# Altium PCB PCB3.PcbDoc
Units mm, origin at the board's own origin, x right, y up, seen from the top; angles counter-clockwise.
Board outline 24.13 x 24.13 mm, 2 copper layers (Top Layer, Bottom Layer); 10 components, 10 nets, 30 pads, 2 vias.
Unrouted connection lines stored in the file: 1.
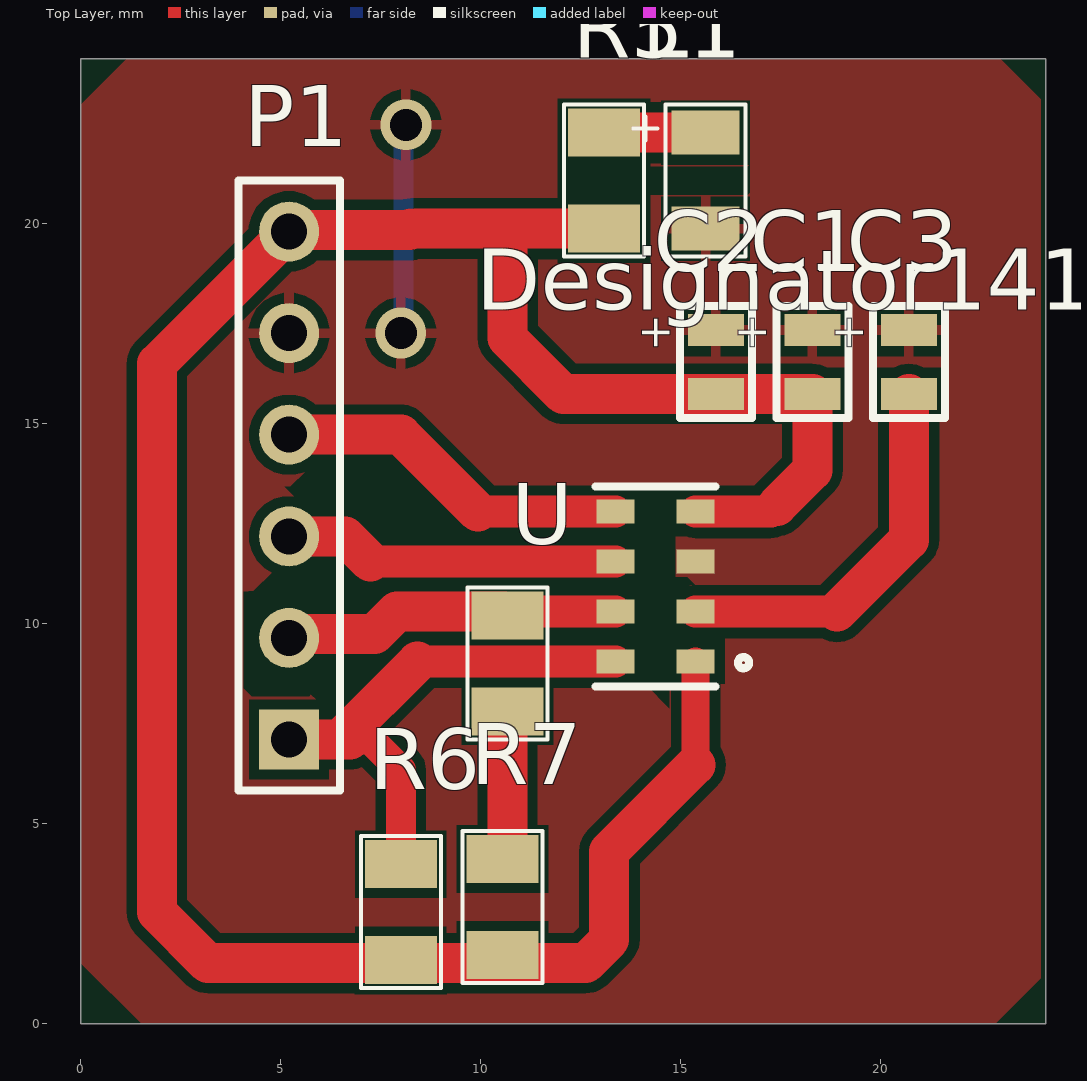
[diagram p0: Top Layer view]
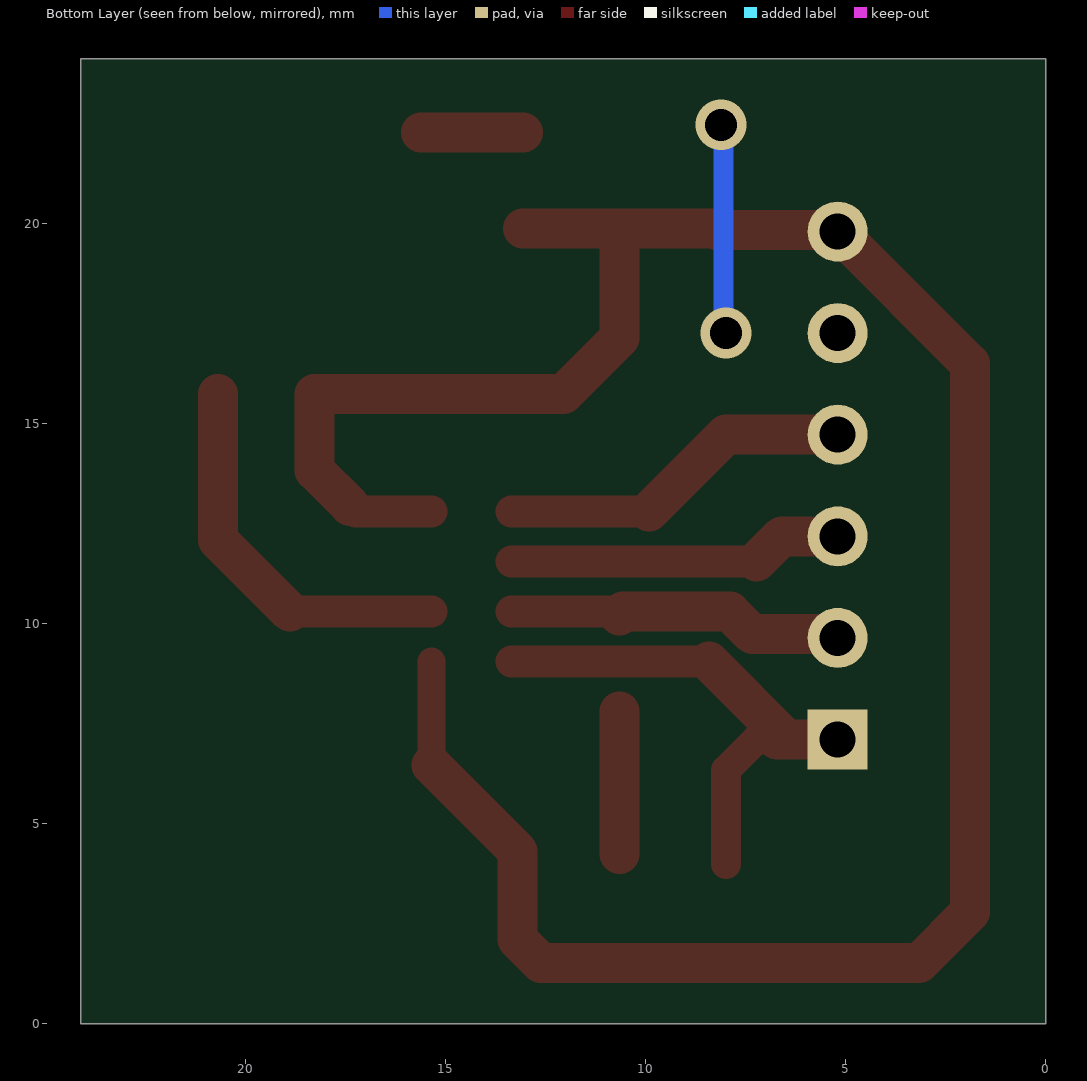
[diagram p1: Bottom Layer view, seen from below]
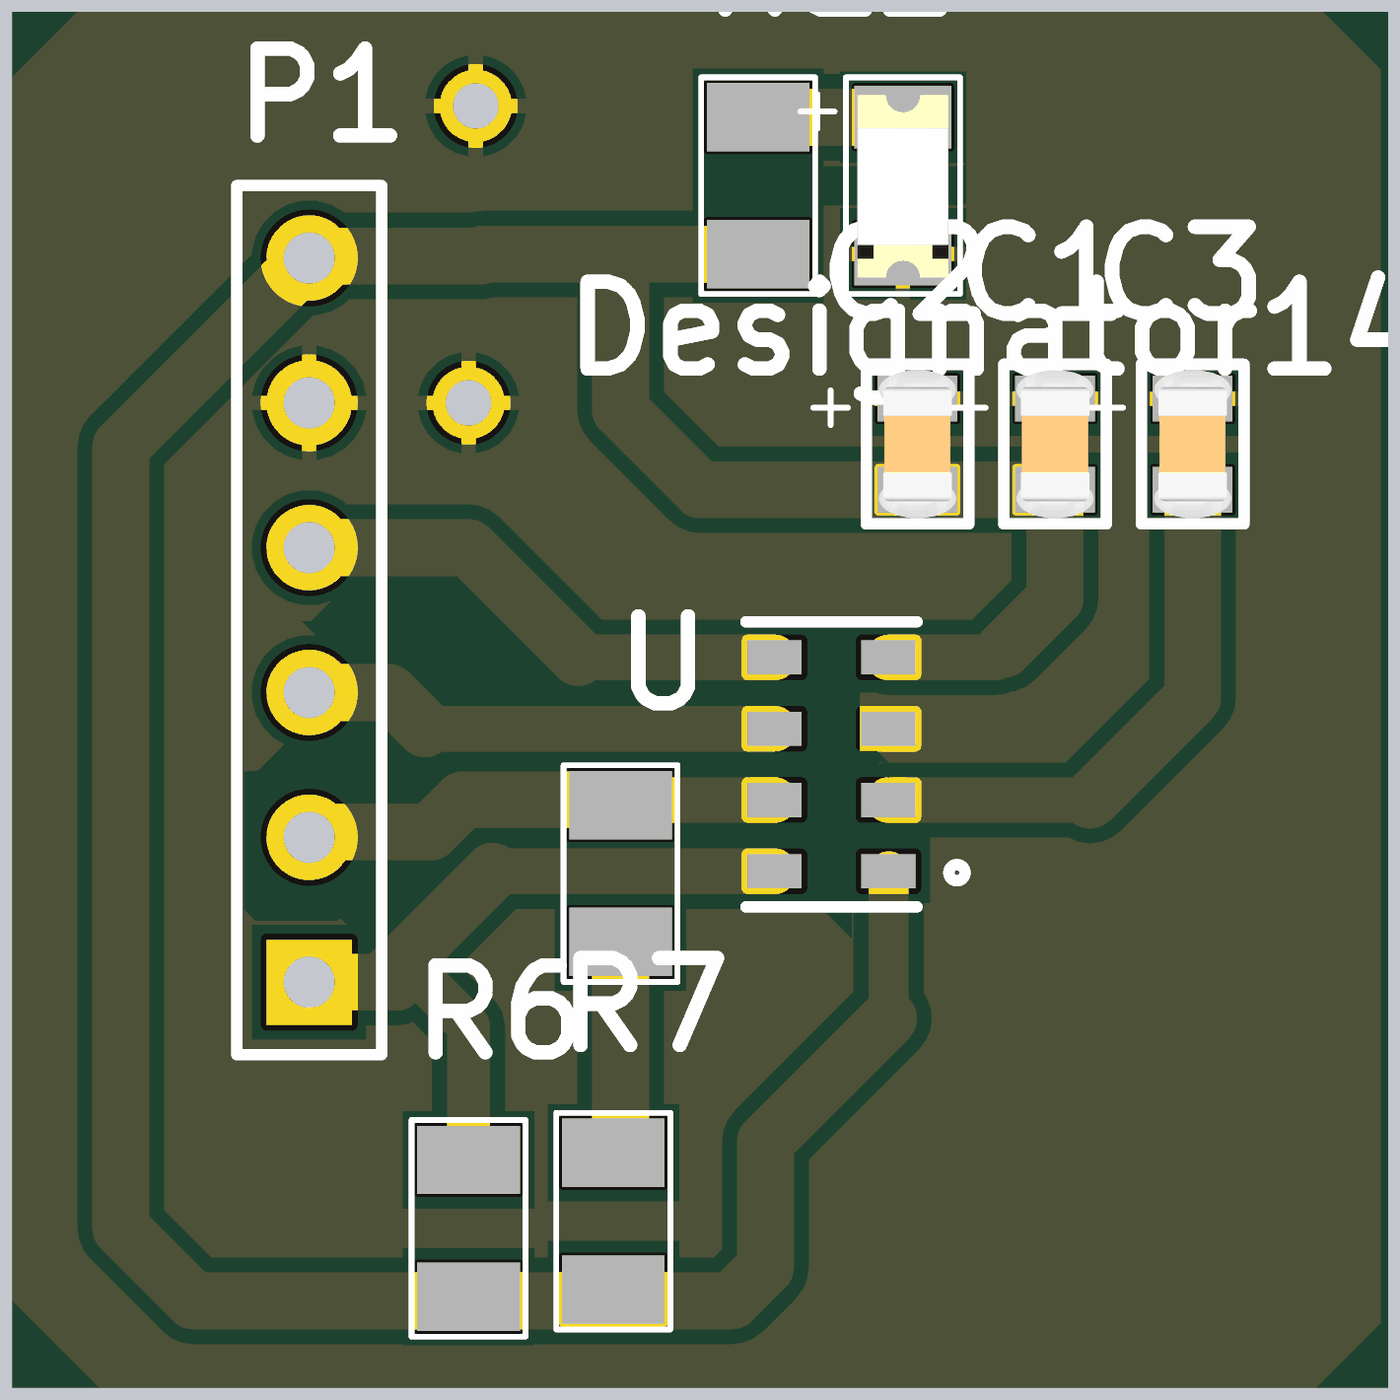
[diagram p2: 3D render of the assembled board from above, using the file's embedded part models]

## Layer stack, top to bottom
Top Solder: solder mask 0.0102, Solder Resist, Dk 3.5
Top Layer: signal copper 0.0356
Dielectric 1: dielectric 0.32, FR-4, Dk 4.8
Bottom Layer: signal copper 0.0356
Bottom Solder: solder mask 0.0102, Solder Resist, Dk 3.5

## Board outline
0,0 0,24.13 24.13,24.13 24.13,0

## Design rules (kind name [scope] priority, off if disabled: settings)
Clearance [All] p1: gap=0.254 ignorepadtopadclearanceinfootprint=FALSE except(0: Arc-Hole Track-Hole SMDPad-Hole THPad-Hole Via-Hole Fill-Hole Poly-Hole Region-Hole Text-Hole)
PolygonConnect [All] p1: connectstyle=Relief reliefconductorwidth=0.254 reliefentries=4 polygonreliefangle="90 Angle" airgapwidth=0.254
RoutingVias [All] p1: holewidth=0.711 width=1.27 viastyle="Through Hole" minholewidth=0.711 minwidth=1.27 maxholewidth=0.711 maxwidth=1.27
SolderMaskExpansion [All] p1: expansion=0.102 istentingtop=FALSE
Width [All] p1: maxlimit=1.5 minlimit=0.254 preferedwidth=0.254
30 further rules are at their usual default settings.

## Classes and differential pairs
component class Sheet3: C1 C2 C3 L1 P1 R5 U

## Components (designator, comment, footprint, x,y, rotation, side; value= is the part's Value field where it differs from the comment)
C1 "100nF" CAP_805 18.288,16.548 r270 top
C2 "10uF" CAP_805 15.875,16.548 r270 top
C3 "CAP 100nF 0805" CAP_805 20.701,16.548 r270 top
Designator141 "Comment" RES_1206 10.668,9.017 r90 top
L1 "Led Red" "Led 1206" 15.621,21.082 r270 top
P1 "Header 6" HDR1X6 5.207,7.112 r90 top
R5 "220R" RES_1206 13.081,21.082 r270 top
R6 "4.7K" RES_1206 8.001,2.794 r270 top
R7 "4.7K" RES_1206 10.541,2.921 r270 top
U "MPL3115A2" PSON125P300X500X120-8N 14.367,10.932 r180 top

## Footprints (in the part's own frame and the unit in brackets; to place one, negate y for a bottom-side part, rotate by r counter-clockwise, add the part's x,y. Pads: shape width x height; smd on the part's side, far side on the other; paste and mask are expansions set on the pad)
CAP_805 [mm]
  rect 0.8x1.4 smd mask+0.05: 1(-0.8,0) 2(0.8,0)
  silkscreen extent -1.4,-0.9 1.4,0.9, body extent -1.3,-0.68 1.3,0.68, height 0.9
HDR1X6 [mm] "Connector; Header; 6 Position"
  rect 1.5x1.5 hole 0.9: 1(0,0)
  round 1.5 hole 0.9: 2(2.54,0) 3(5.08,0) 4(7.62,0) 5(10.16,0) 6(12.7,0)
  silkscreen extent -1.27,-1.27 13.97,1.27
"Led 1206" [mm]
  rect 1.1x1.7 smd mask+0.05: 1(-1.2,0) 2(1.2,0)
  silkscreen extent -1.9,-1.8 1.9,1, body extent -1.59,-0.8 1.61,0.8, height 1.1
PSON125P300X500X120-8N [mm]
  rect 0.95x0.6 smd: 1(-1,1.875) 2(-1,0.625) 3(-1,-0.625) 4(-1,-1.875) 5(1,-1.875) 6(1,-0.625) 7(1,0.625) 8(1,1.875)
  silkscreen extent -2.34,-2.5 1.5,2.5, body extent -1.5,-2.63 1.5,2.37, height 1.1
RES_1206 [mm]
  rect 1.2x1.8 smd mask+0.05: 1(-1.2,0) 2(1.2,0)
  silkscreen extent -1.9,-1 1.9,1, body extent -1.57,-0.82 1.57,0.82, height 0.53

## Part data
C1 C2: library part "CAP 100nF 0805", "0805 smd"
C3: "0805 smd"
P1: "Header, 6-Pin", LatestRevisionDate=17-Jul-2002, LatestRevisionNote="Re-released for DXP Platform.", Publisher="Altium Limited"
R5 R6 R7: library part "RES 4.7K 1206"
U: "Pressure Sensor 7.25PSI ~ 15.95PSI _50kPa ~ 110kPa_ Absolute 24 b 8-TLGA", Package="LGA-8 NXP USA", Availability=Unavailable, MF="NXP USA", MP=MPL3115A2, Price=None, SnapEDA_Link=https://www.snapeda.com/parts/MPL3115A2/NXP%20USA%20Inc./view-part/472433/?ref=snap

## Via types
v1: diameter 1.27, hole 0.8, Top Layer to Bottom Layer, 2 vias

## Nets (pads, with @x,y where several pads share a name; then routed paths per layer and width w, separated by ;. In a path a pad name is that pad's centre, name@x,y a point inside that pad or via, vN(x,y) a via of type N, cw(c..) or ccw(c..) an arc to the next point about the centre after c; other vN are vias at no path point)
+3V3: C1.2 C2.2 P1.6 R5.2 R6.2 R7.2 U.1 U.4 | length 62.4
  Top Layer w0.5: 17.252,12.807 17.399,12.954
  Top Layer w0.7: 15.367,6.477 U.1
  Top Layer w0.8: U.4 17.252,12.807
  Top Layer w1: R5.2 10.668,19.882 ; 15.367,6.477 13.208,4.318 13.208,2.11 12.622,1.524 10.541,1.524 7.62,1.524 6.35,1.524 3.175,1.524 1.905,2.794 1.905,16.51 P1.6 5.242,19.847 8.22,19.847 8.255,19.882 10.668,19.882 ; 17.399,12.954 18.288,13.843 C1.2 C2.2 12.065,15.748 10.668,17.145 10.668,19.882
CAP: C3.2 U.2 | length 9.7
  Top Layer w0.8: U.2 18.903,10.307
  Top Layer w1: 18.903,10.307 20.701,12.105 C3.2
GND: C1.1 C2.1 C3.1 L1.2 P1.5 U.3 | length 5.3
  Bottom Layer w0.5: v1(8.001,17.272) 8.064,17.335 8.064,22.415 v1(8.128,22.479)
INT1: P1.3 U.6 | length 8.4
  Top Layer w0.8: 7.239,11.557 U.6
  Top Layer w1: P1.3 6.604,12.192 7.239,11.557
INT2: P1.4 U.5 | length 9
  Top Layer w0.8: 9.926,12.807 U.5
  Top Layer w1: P1.4 8.001,14.732 9.926,12.807
NetL1_1: L1.1 R5.1 | length 2.5
  Top Layer w1: R5.1 L1.1
NetR3_1: 
NetR3_2: 
SCL: P1.1 R6.1 U.8 | length 13.2
  Top Layer w0.75: 6.731,7.112 7.239,7.112 8.001,6.35 R6.1
  Top Layer w0.8: 8.422,9.057 U.8
  Top Layer w1: P1.1 6.731,7.112 ; 6.477,7.112 8.422,9.057
SDA: Designator141.1 Designator141.2 P1.2 R7.1 U.7 | length 12.4
  Top Layer w0.5: P1.2 P1.2@5.478,9.652 ; R7.1 R7.1@10.668,4.248
  Top Layer w0.8: Designator141.2 10.758,10.307 U.7
  Top Layer w1: P1.2@5.438,9.652 5.438,9.748 7.339,9.748 7.903,10.311 10.574,10.311 Designator141.2 ; R7.1@10.668,4.248 Designator141.1

## Polygon pours and split planes (outlines as drawn)
GND on Top Layer "GND_L01_P000" (solid, remove dead copper, pour order 0): 0,22.987 1.143,24.13 22.987,24.13 24.003,23.114 24.003,1.143 22.86,0 1.524,0 0,1.524

## Other copper
Top Layer:
  pour cut-out: 15.367,10.967 15.166,11.168 14.859,11.168 14.859,10.906 14.832,10.878 15.13,10.878 15.219,10.967
  pour cut-out: 15.174,12.192 14.859,12.192 14.798,12.253 15.113,12.253
  pour cut-out: 14.859,11.43 14.859,10.906 14.726,10.773 14.61,10.889 14.61,11.181 14.748,11.319
  pour cut-out: 11.927,21.428 11.927,20.736 16.675,20.736 16.725,20.786 16.725,21.478 16.675,21.428
  pour cut-out: 4.318,10.795 4.485,10.962 5.6,10.962 5.831,10.731 9.202,10.731 8.889,11.043 7.026,11.043 6.391,11.678 6.016,11.678 5.727,11.389 4.874,11.389 4.292,10.806
  pour cut-out: 14.096,10.889 14.574,10.889 14.638,10.953 14.638,11.209 14.859,11.43 14.859,12.192 14.798,12.253 14.38,12.253 14.238,12.111 14.096,12.111
  pour cut-out: 14.096,8.503 14.726,7.873 14.726,10.773 14.61,10.889 14.096,10.889
  pour cut-out: 12.638,12.293 12.993,11.938 7.585,11.938 6.856,12.667 6.383,12.667 6.344,12.706 6.016,12.706 5.727,12.995 5.524,12.995 5.075,13.444 5.242,13.444 5.914,14.116 5.967,14.116 6.07,14.218 7.843,14.218 9.768,12.293 12.456,12.293
  pour cut-out: 14.096,13.361 14.638,13.361 14.638,12.253 14.096,12.253
  pour cut-out: 14.638,9.753 14.638,9.611 16.096,9.611 16.096,9.753
  pour cut-out: 11.822,9.748 11.822,9.571 12.638,9.571 12.638,9.611 14.096,9.611 14.096,9.753 11.827,9.753
  pour cut-out: 11.822,11.043 11.822,10.776 14.096,10.776 14.096,11.003 12.638,11.003 12.638,11.043
  pour cut-out: 12.638,12.253 12.638,12.071 12.678,12.111 14.238,12.111 14.096,12.253
  pour cut-out: 5.339,8.648 5.754,8.233 5.705,8.185 4.272,8.185 4.064,8.392 4.064,10.806 5.809,10.962
  pour cut-out: 6.255,9.703 8.79,9.703 8.829,9.665 8.829,9.609 7.094,7.874 6.453,7.874 6.211,8.116 5.871,8.116 5.339,8.648 5.727,9.036 6.01,9.036 6.211,9.236

## Text inside footprints (layer, text, board x,y; h text height)
C1: Top Overlay "+" at 16.455,17.748 h0.8 r270
C2: Top Overlay "+" at 14.042,17.748 h0.8 r270
C3: Top Overlay "+" at 18.868,17.748 h0.8 r270